# EAGLE board ECE3992_APS (EAGLE 9.6.2)
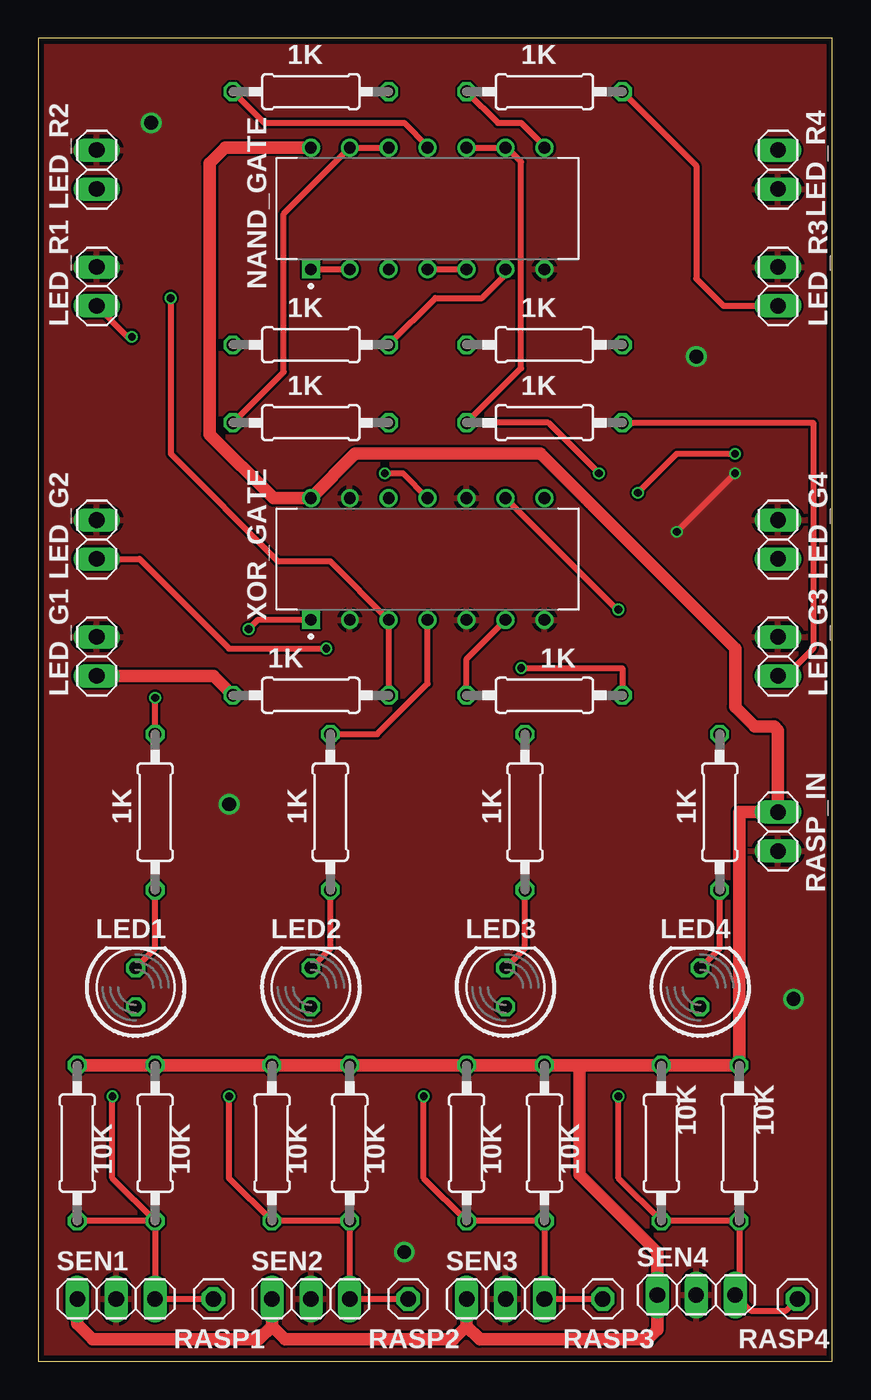
[diagram p0: board, top side]
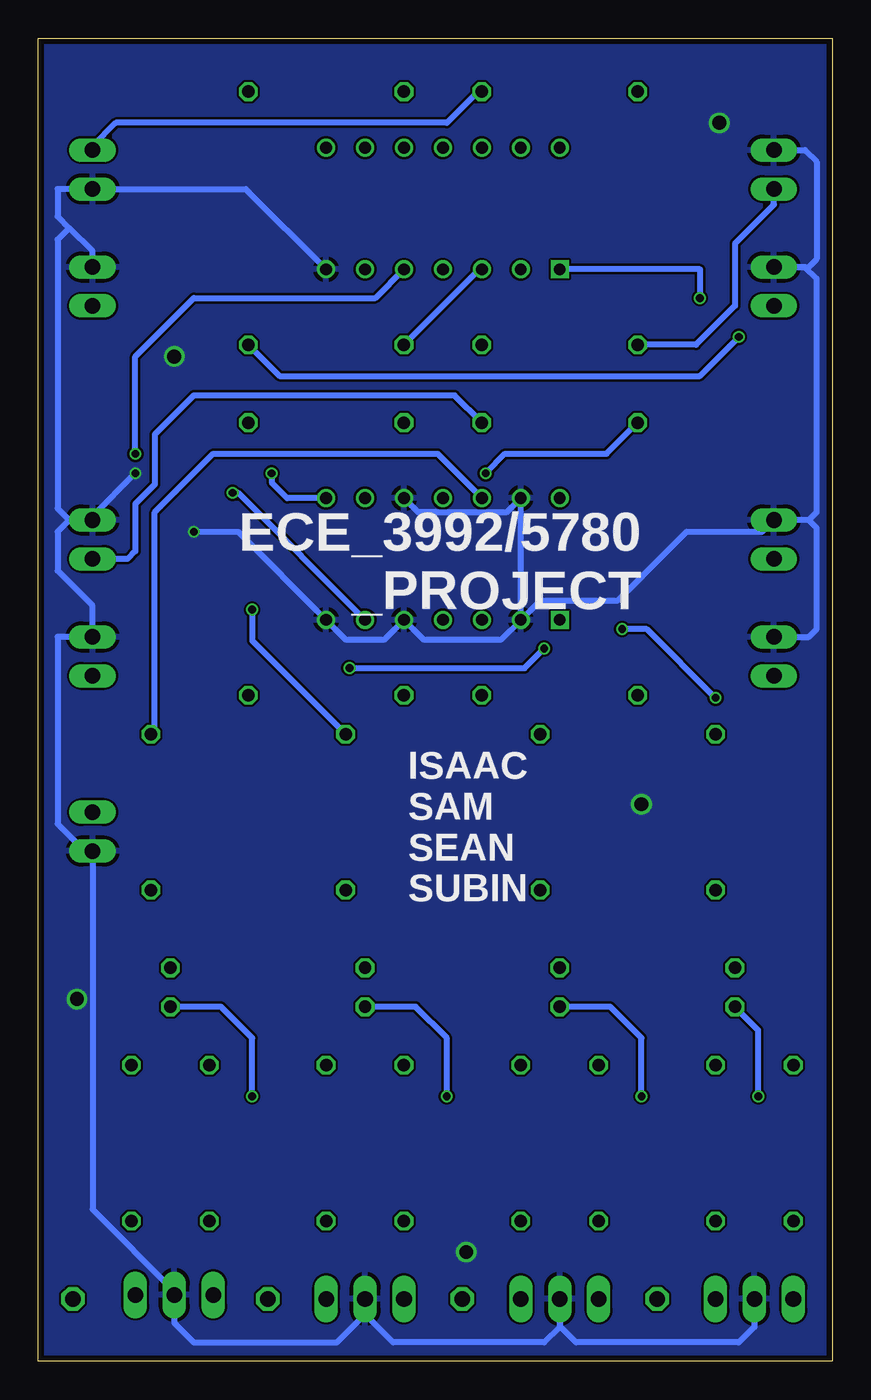
[diagram p1: board, bottom side, seen from below]

Size 51.8 x 86.28 mm. Coordinates in mm from the lower left corner, seen from the top.
Outline: 0,0 51.8,0 51.8,86.28 0,86.28 0,0
Copper layers (1*16): Top 0.035559375mm / dielectric 1.6mm / Bottom 0.035559375mm
Design rules "oshpark-2layer": minimum track width 6mil, minimum drill 10mil, track to track 6mil, track to pad 6mil, pad to pad 6mil, via to via 6mil, smd to smd 6mil, copper to edge 15mil, drill to drill 6mil, minimum pad ring 5mil, minimum via ring 5mil, stop-mask expansion 2.5mil, vias tented up to drill 0mil, thermal gap 10mil

## Footprints (pad centres in the part's own frame; a part is rotated, then mirrored left to right if it is on the bottom)
0207/10 = drill 0.813 octagon: 1 -5.08,0; 2 5.08,0
LED5MM = drill 0.813 octagon: A -1.27,0; K 1.27,0
1X02 = drill 1.016 long: 1 -1.27,0; 2 1.27,0
DIP794W45P254L1969H508Q14 = drill 0.77 pad 1.17 square: 1 -3.97,7.62 | drill 0.77 pad 1.17: 2 -3.97,5.08; 3 -3.97,2.54; 4 -3.97,0; 5 -3.97,-2.54; 6 -3.97,-5.08; 7 -3.97,-7.62; 8 3.97,-7.62; 9 3.97,-5.08; 10 3.97,-2.54; 11 3.97,0; 12 3.97,2.54; 13 3.97,5.08; 14 3.97,7.62
1X01 = drill 1.016 octagon: 1 0,0
1X03 = drill 1.016 long: 1 -2.54,0; 2 0,0; 3 2.54,0

## Placement (x,y rotation side)
1K  1K  [0207/10]  7.62,35.81 90 top
LED1  [LED5MM]  6.35,24.38 90 top
LED2  [LED5MM]  17.78,24.38 90 top
LED3  [LED5MM]  30.48,24.38 90 top
LED4  [LED5MM]  43.18,24.38 90 top
LED_G1  [1X02]  3.81,45.97 90 top
LED_G2  [1X02]  3.81,53.59 90 top
LED_G3  [1X02]  48.26,45.97 90 top
LED_G4  [1X02]  48.26,53.59 90 top
LED_R1  [1X02]  3.81,70.1 90 top
LED_R2  [1X02]  3.81,77.72 90 top
LED_R3  [1X02]  48.26,70.1 90 top
LED_R4  [1X02]  48.26,77.72 270 top
NAND_GATE  SN74HC00N  [DIP794W45P254L1969H508Q14]  25.4,75.18 90 top
R1  10K  [0207/10]  7.62,14.22 90 top
R3  1K  [0207/10]  17.78,43.43 180 top
R4  1K  [0207/10]  33.02,66.29 0 top
R5  1K  [0207/10]  33.02,43.43 0 top
R6  1K  [0207/10]  33.02,61.21 0 top
R7  1K  [0207/10]  17.78,61.21 0 top
R8  1K  [0207/10]  17.78,66.29 180 top
R9  1K  [0207/10]  33.02,82.8 0 top
R10  1K  [0207/10]  17.78,82.8 0 top
R11  10K  [0207/10]  2.54,14.22 90 top
R12  1K  [0207/10]  19.05,35.81 90 top
R13  10K  [0207/10]  15.24,14.22 90 top
R14  1K  [0207/10]  31.75,35.81 90 top
R15  10K  [0207/10]  20.32,14.22 90 top
R16  1K  [0207/10]  44.45,35.81 90 top
R17  10K  [0207/10]  27.94,14.22 90 top
R18  10K  [0207/10]  33.02,14.22 90 top
R19  10K  [0207/10]  40.64,14.22 90 top
R20  10K  [0207/10]  45.72,14.22 90 top
RASP1  [1X01]  11.43,4.06 0 top
RASP2  [1X01]  24.13,4.06 0 top
RASP3  [1X01]  36.83,4.06 0 top
RASP4  [1X01]  49.53,4.06 0 top
RASP_IN  [1X02]  48.26,34.54 270 top
SEN1  [1X03]  5.08,4.06 0 top
SEN2  [1X03]  17.78,4.06 0 top
SEN3  [1X03]  30.48,4.06 0 top
SEN4  [1X03]  42.93,4.32 0 top
XOR_GATE  SN74HC86N  [DIP794W45P254L1969H508Q14]  25.4,52.32 90 top

## Library data of the parts
1K R1 R3-R20 = rcl; SPICEPREFIX: R
LED1-LED4 = led
LED_G1-LED_G4 LED_R1-LED_R4 RASP1-RASP4 RASP_IN SEN1-SEN4 = pinhead
NAND_GATE = SN74HC00N; AVAILABILITY: In Stock; CHECK_PRICES: https://www.snapeda.com/parts/SN74HC00N/Texas+Instruments/view-part/?ref=eda; DESCRIPTION: 4-ch, 2-input, 2-V to 6-V 5.2 mA drive strength NAND gate; MF: Texas Instruments; MP: SN74HC00N; PACKAGE: PDIP-14 Texas Instruments; PRICE: None; SNAPEDA_LINK: https://www.snapeda.com/parts/SN74HC00N/Texas+Instruments/view-part/?ref=snap
XOR_GATE = SN74HC86N; AVAILABILITY: In Stock; CHECK_PRICES: https://www.snapeda.com/parts/SN74HC86N/Texas+Instruments/view-part/?ref=eda; DESCRIPTION: 4-ch, 2-input, 2-V to 6-V 5.2 mA drive strength XOR (exclusive OR) gate; MF: Texas Instruments; MP: SN74HC86N; PACKAGE: PDIP-14 Texas Instruments; PRICE: None; PURCHASE-URL: https://www.snapeda.com/api/url_track_click_mouser/?unipart_id=236147&manufacturer=Texas Instruments&part_name=SN74HC86N&search_term= sn74hc86n; SNAPEDA_LINK: https://www.snapeda.com/parts/SN74HC86N/Texas+Instruments/view-part/?ref=snap

## Nets
+3V3: NAND_GATE.14 R1.2 R11.2 R13.2 R15.2 R17.2 R18.2 R19.2 R20.2 RASP_IN.1 SEN1.1 SEN2.1 SEN3.1 SEN4.1 XOR_GATE.14
GND: LED_G1.2 LED_G2.2 LED_G3.2 LED_G4.2 LED_R1.2 LED_R2.2 LED_R3.2 LED_R4.2 NAND_GATE.7 RASP_IN.2 SEN1.2 SEN2.2 SEN3.2 SEN4.2 XOR_GATE.2 XOR_GATE.5 XOR_GATE.7 XOR_GATE.10 XOR_GATE.13
INV_1: NAND_GATE.1 NAND_GATE.2 R3.1 XOR_GATE.3
INV_2: NAND_GATE.4 NAND_GATE.5 R5.1 XOR_GATE.6
INV_3: NAND_GATE.9 NAND_GATE.10 R6.1 XOR_GATE.8
INV_4: NAND_GATE.12 NAND_GATE.13 R7.1 XOR_GATE.11
N$1: LED1.A R1.1 R11.1 RASP1.1 SEN1.3
N$2: 1K.1 LED1.K
N$3: LED_G1.1 R3.2
N$4: LED_G2.1 R5.2
N$5: LED_G3.1 R6.2
N$6: LED_G4.1 R7.2
N$7: LED_R1.1 R4.2
N$8: LED_R2.1 R8.2
N$9: LED_R3.1 R9.2
N$10: LED_R4.1 R10.2
N$11: NAND_GATE.6 R8.1
N$12: NAND_GATE.3 R4.1
N$13: LED2.K R12.1
N$14: LED2.A R13.1 R15.1 RASP2.1 SEN2.3
N$15: LED3.K R14.1
N$16: LED4.K R16.1
N$17: LED4.A R19.1 R20.1 RASP4.1 SEN4.3
N$18: LED3.A R17.1 R18.1 RASP3.1 SEN3.3
N$19: NAND_GATE.8 R9.1
N$20: NAND_GATE.11 R10.1
SEN_1: 1K.2 XOR_GATE.1
SEN_2: R12.2 XOR_GATE.4
SEN_3: R14.2 XOR_GATE.9
SEN_4: R16.2 XOR_GATE.12

## Tracks (layer width: path | path; a pad name or v marks a point on that pad's centre or on a via)
+3V3
  Top 0.813: R11.2 R1.2 R13.2 R15.2 R17.2 R18.2 | SEN1.1 2.54,2.44 3.56,1.42 14.38,1.42 15.24,2.29 | 15.24,2.29 SEN2.1 | SEN3.1 27.94,2.29 | 15.24,2.29 16.1,1.42 27.08,1.42 27.94,2.29 | 27.94,2.29 28.8,1.42 39.78,1.42 40.39,2.03 SEN4.1 40.39,7.11 35.31,12.19 35.31,19.3 R18.2 | R18.2 R19.2 R20.2 45.72,35.81 RASP_IN.1 48.26,41.15 48.01,41.4 46.74,41.4 45.47,42.67 45.47,46.48 32.77,59.18 20.67,59.18 XOR_GATE.14 15.33,56.29 11.18,60.45 11.18,78.14 12.19,79.15 NAND_GATE.14
GND  (via drill 0.5 pad 0.76, 0.9 pad 0.76)
  Top 0.406: v45.47,57.91 v41.66,54.1
  Bottom 0.406: 30.48,3.05 SEN3.2 | 30.48,3.05 32.31,1.22 41.66,1.22 42.93,2.49 SEN4.2 42.93,4.57 48.26,9.91 RASP_IN.2 48.77,33.27 50.55,35.05 50.55,47.24 LED_G3.2 48.26,49.28 50.55,51.56 50.55,54.1 49.78,54.86 | SEN1.2 5.08,2.24 6.1,1.22 16.71,1.22 17.78,2.29 SEN2.2 17.78,2.24 18.8,1.22 28.65,1.22 30.48,3.05 | XOR_GATE.2 19.05,49.62 13.97,49.62 9.49,54.1 4.57,54.1 LED_G2.2 1.52,54.86 | XOR_GATE.2 XOR_GATE.13 21.26,55.35 25.79,55.35 25.81,55.37 27.02,55.37 XOR_GATE.10 | LED_R3.2 48.26,72.39 49.78,73.91 | 49.78,73.91 50.55,73.15 50.55,55.63 49.78,54.86 | 49.78,73.91 50.55,74.68 50.55,76.45 LED_R4.2 38.26,76.45 NAND_GATE.7 | v41.66,54.1 38.77,54.1 XOR_GATE.7 31.71,47.04 29.25,47.04 XOR_GATE.5 26.63,47.04 21.63,47.04 XOR_GATE.2 | v45.47,57.91 48.26,55.12 LED_G4.2 49.78,54.86 | LED_R2.2 1.78,78.99 1.02,78.23 1.02,71.88 1.52,71.37 LED_R1.2 1.78,71.37 1.02,70.61 1.02,55.37 1.52,54.86 | LED_G1.2 1.52,47.24 1.02,47.75 1.02,54.36 1.52,54.86
  other vias: 7.37,80.77 42.93,65.53 12.45,36.32 49.28,23.62 23.88,7.11
  pour Bottom: -0.25,87.12 51.82,87.12 51.82,-0.51 -0.25,-0.51
  pour Top: -0.25,87.12 51.82,87.12 51.82,-0.51 -0.25,-0.51
INV_1  (via drill 0.5 pad 0.76)
  Top 0.406: R3.1 XOR_GATE.3 19.05,52.16 15.65,52.16 8.64,59.18 v8.64,69.34 | NAND_GATE.1 NAND_GATE.2
  Bottom 0.406: v8.64,69.34 8.64,71.21 NAND_GATE.1
INV_2  (via drill 0.5 pad 0.76)
  Top 0.406: R5.1 27.94,45.81 XOR_GATE.6 | NAND_GATE.4 NAND_GATE.5 | v39.12,56.64 41.66,59.18 v45.47,59.18
  Bottom 0.406: XOR_GATE.6 38.77,56.64 v39.12,56.64 | v45.47,59.18 45.47,65.53 41.66,69.34 29.81,69.34 NAND_GATE.5
INV_3  (via drill 0.5 pad 0.76)
  Top 0.406: NAND_GATE.10 NAND_GATE.9 30.57,79.15 31.5,78.23 31.5,64.77 R6.1 33.27,61.21 v36.58,57.91
  Bottom 0.406: XOR_GATE.8 35.56,56.29 36.58,57.31 v36.58,57.91
INV_4  (via drill 0.5 pad 0.76)
  Top 0.406: NAND_GATE.12 NAND_GATE.13 16,74.84 16,64.52 R7.1 | v22.61,57.91 23.78,57.91 XOR_GATE.11
  Bottom 0.406: v22.61,57.91 21.34,59.18 14.73,59.18 R7.1
N$1  (via drill 0.5 pad 0.76)
  Top 0.406: R1.1 R11.1 | R1.1 SEN1.3 RASP1.1 | R1.1 4.83,11.94 v4.83,17.27
  Bottom 0.406: v4.83,17.27 4.83,21.59 LED1.A
N$2
  Top 0.406: LED1.K 7.62,26.92 1K.1
N$3
  Top 0.813: R3.2 11.43,44.7 LED_G1.1
N$4  (via drill 0.5 pad 0.76)
  Top 0.406: LED_G2.1 6.6,52.32 12.45,46.48 v18.8,46.48 | v31.5,45.21 38.1,45.21 R5.2
  Bottom 0.406: v31.5,45.21 20.07,45.21 v18.8,46.48
N$5
  Top 0.406: R6.2 50.55,61.21 50.55,46.48 48.77,44.7 LED_G3.1
N$6
  Bottom 0.406: R7.2 24.64,62.99 41.66,62.99 44.2,60.45 44.2,57.18 45.47,55.91 45.47,52.83 45.97,52.32 LED_G4.1
N$7  (via drill 0.5 pad 0.76)
  Top 0.406: LED_R1.1 5.84,66.8 v6.1,66.8
  Bottom 0.406: v6.1,66.8 8.64,64.26 36.07,64.26 R4.2
N$8
  Bottom 0.406: R8.2 8.89,66.29 6.35,68.83 6.35,72.9 3.81,75.44 LED_R2.1
N$9
  Top 0.406: R9.2 42.93,77.98 42.93,70.61 44.7,68.83 LED_R3.1
N$10
  Bottom 0.406: R10.2 23.11,82.8 25.15,80.77 46.74,80.77 48.26,79.25 LED_R4.1
N$11
  Top 0.406: R8.1 25.91,69.34 28.96,69.34 30.48,70.87 NAND_GATE.6
N$12
  Bottom 0.406: NAND_GATE.3 23.02,71.21 R4.1
N$13
  Top 0.406: LED2.K 19.05,26.92 R12.1
N$14  (via drill 0.5 pad 0.76)
  Top 0.406: v12.45,17.27 12.45,11.94 R13.1 R15.1 SEN2.3 RASP2.1
  Bottom 0.406: v12.45,17.27 12.45,21.08 14.48,23.11 LED2.A
N$15
  Top 0.406: LED3.K 31.75,26.92 R14.1
N$16
  Top 0.406: LED4.K 44.45,26.92 R16.1
N$17  (via drill 0.5 pad 0.76)
  Top 0.406: RASP4.1 48.77,3.3 46.48,3.3 SEN4.3 45.72,4.57 R20.1 R19.1 37.85,11.94 v37.85,17.27
  Bottom 0.406: v37.85,17.27 37.85,21.08 39.88,23.11 LED4.A
N$18  (via drill 0.5 pad 0.76)
  Top 0.406: RASP3.1 SEN3.3 R18.1 R17.1 25.15,11.94 v25.15,17.27
  Bottom 0.406: v25.15,17.27 25.15,21.08 27.18,23.11 LED3.A
N$19
  Top 0.406: R9.1 29.97,80.77 31.5,80.77 33.02,79.25 NAND_GATE.8
N$20
  Top 0.406: R10.1 14.73,80.77 23.88,80.77 25.4,79.25 NAND_GATE.11
SEN_1  (via drill 0.5 pad 0.76)
  Top 0.406: 1K.2 v7.62,43.27 | XOR_GATE.1 14.32,48.35 v13.72,47.75
  Bottom 0.406: v7.62,43.27 12.11,47.75 v13.72,47.75
SEN_2
  Top 0.406: XOR_GATE.4 25.4,44.2 22.1,40.89 R12.2
SEN_3  (via drill 0.5 pad 0.76)
  Top 0.406: v37.85,49.02 37.65,49.02 37.65,49.12 XOR_GATE.9
  Bottom 0.406: v37.85,49.02 37.85,46.99 R14.2
SEN_4
  Bottom 0.406: R16.2 44.2,41.15 44.2,55.37 40.39,59.18 25.75,59.18 XOR_GATE.12

## Text on the board
tPlace: 1K | 1K | 1K | 1K | 1K | 1K | 1K | 1K | 1K | 1K | 1K | 1K | 10K | 10K | 10K | 10K | 10K | 10K | 10K | 10K
bPlace: ECE_3992/5780 / _PROJECT | ISAAC / SAM / SEAN / SUBIN